# EAGLE board Minimal_carrier_board_for_CM4_rev_B (EAGLE 9.6.2)
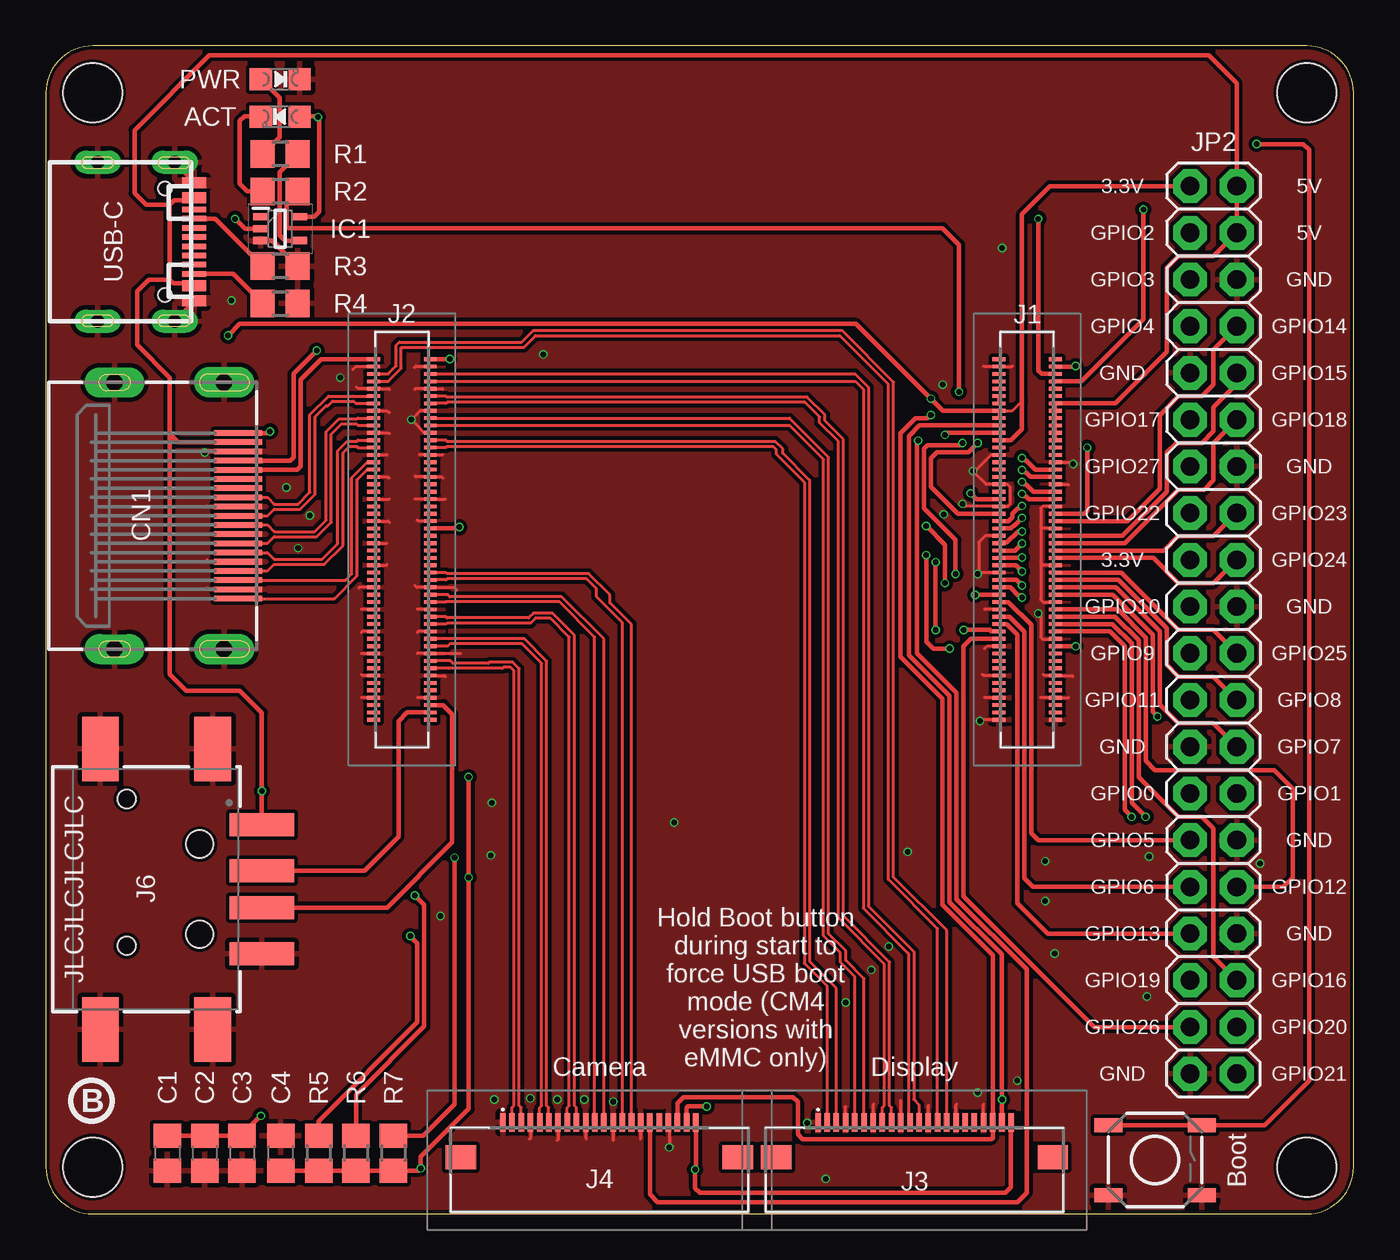
[diagram p0: board, top side]
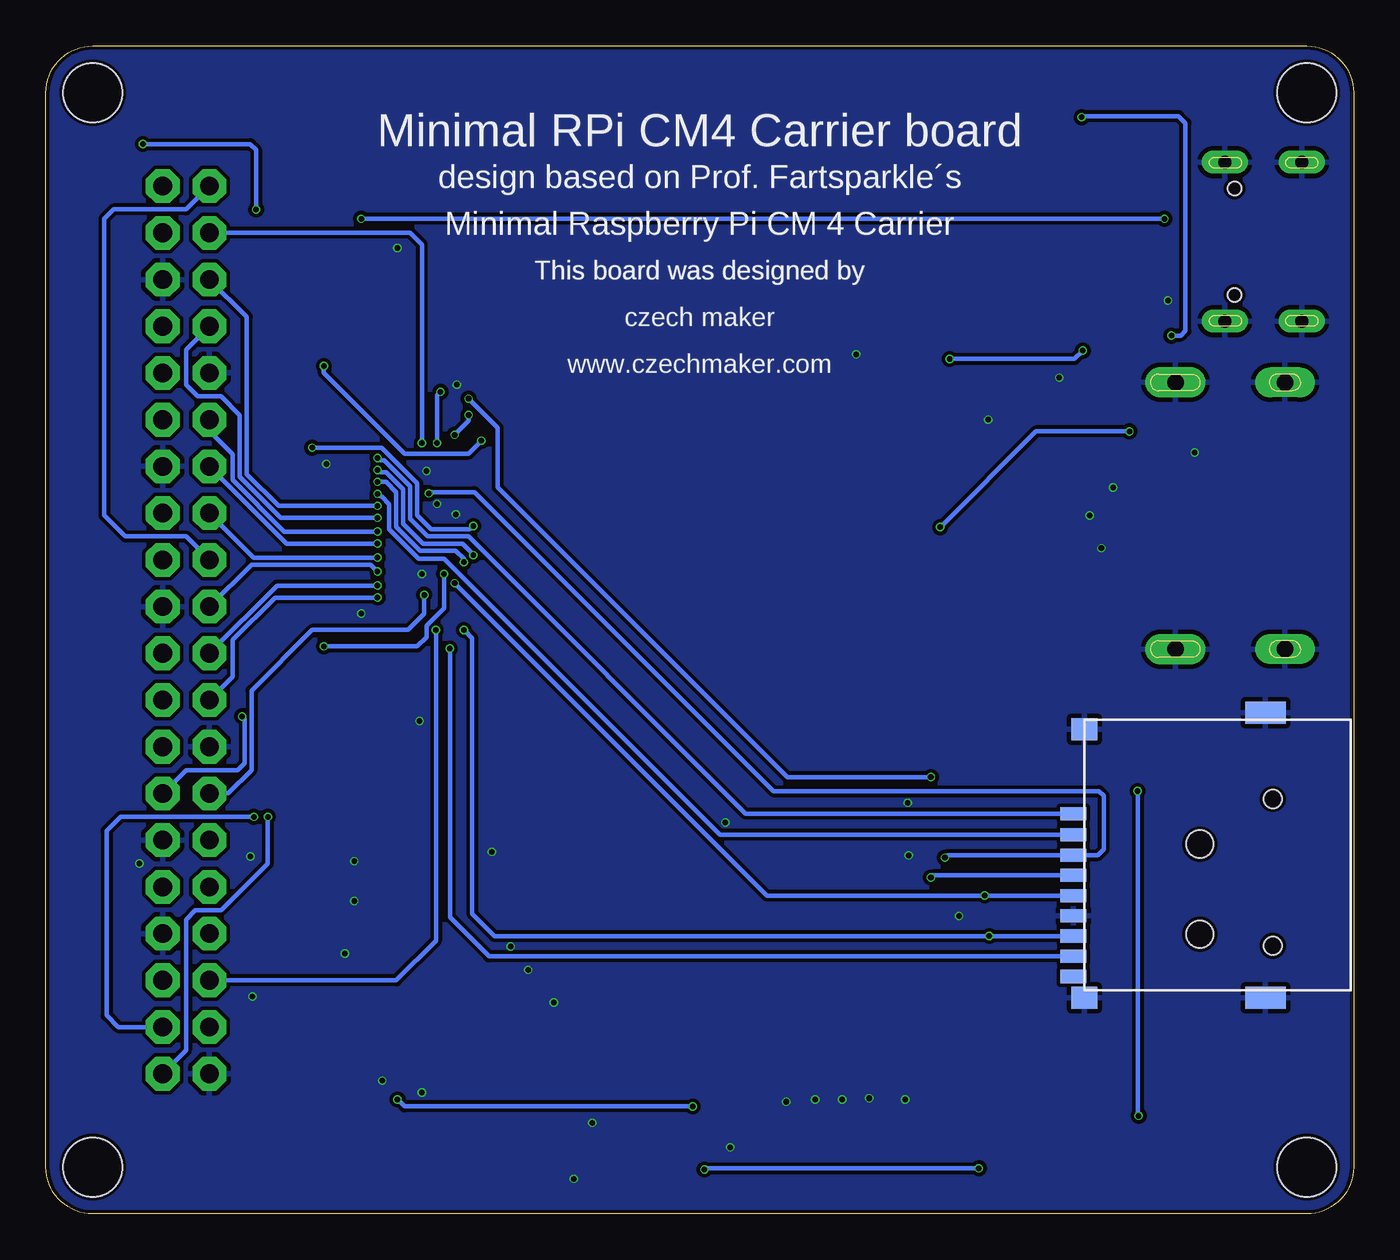
[diagram p1: board, bottom side, seen from below]

Size 71.12 x 63.5 mm. Coordinates in mm from the lower left corner, seen from the top.
Outline: 2.54,0 68.58,0 arc90 71.12,2.54 71.12,60.96 arc90 68.58,63.5 2.54,63.5 arc90 0,60.96 0,2.54 arc90 2.54,0
Copper layers (1*16): Top 0.035mm / dielectric 1.6mm / Bottom 0.035mm
Design rules "jlcpcb2layer": minimum track width 5mil, minimum drill 0.3mm, track to track 5mil, track to pad 5mil, pad to pad 5mil, via to via 5mil, smd to smd 5mil, copper to edge 0.2mm, drill to drill 6mil, minimum pad ring 10mil, minimum via ring 3mil, stop-mask expansion 4mil, vias tented up to drill 0mil, thermal gap 10mil
Net classes: 1 diff_pairs: width 0.152 mm
Holes 3.2 mm at 68.58,2.54 2.54,2.54 68.58,60.96 2.54,60.96

## Footprints (pad centres in the part's own frame; a part is rotated, then mirrored left to right if it is on the bottom)
CHIPLED_0805_NOOUTLINE = smd 1.2 x 1.2: A 0,-1.05; C 0,1.05
TACTILE_SWITCH_5X5_MICRO = smd 1.524 x 0.762: 1 -2.54,1.905; 2 2.54,1.905; 3 -2.54,-1.905; 4 2.54,-1.905
C0805 = smd 1.3 x 1.5: 1 -0.95,0; 2 0.95,0
HDMI_MOLEX_47151-0001 = smd 0.3 x 2.6: 1 4.5,0; 2 4,0; 3 3.5,0; 4 3,0; 5 2.5,0; 6 2,0; 7 1.5,0; 8 1,0; 9 0.5,0; 10 0,0; 11 -0.5,0; 12 -1,0; 13 -1.5,0; 14 -2,0; 15 -2.5,0; 16 -3,0; 17 -3.5,0; 18 -4,0; 19 -4.5,0 | drill 0.9 pad 1.65 long: P$1 -7.25,-0.76; P$2 7.25,-0.76 | drill 0.9 pad 1.5 long: P$3 7.25,-6.72; P$4 -7.25,-6.72
SOT65P210X110-5N = smd 0.85 x 0.4: 1 -1.05,0.65; 2 -1.05,0; 3 -1.05,-0.65; 4 1.05,-0.65; 5 1.05,0.65
DF40C100DS04V51 = smd 0.2 x 0.7: 1 -9.8,-1.54; 2 -9.8,1.54; 3 -9.4,-1.54; 4 -9.4,1.54; 5 -9,-1.54; 6 -9,1.54; 7 -8.6,-1.54; 8 -8.6,1.54; 9 -8.2,-1.54; 10 -8.2,1.54; 11 -7.8,-1.54; 12 -7.8,1.54; 13 -7.4,-1.54; 14 -7.4,1.54; 15 -7,-1.54; 16 -7,1.54; 17 -6.6,-1.54; 18 -6.6,1.54; 19 -6.2,-1.54; 20 -6.2,1.54; 21 -5.8,-1.54; 22 -5.8,1.54; 23 -5.4,-1.54; 24 -5.4,1.54; 25 -5,-1.54; 26 -5,1.54; 27 -4.6,-1.54; 28 -4.6,1.54; 29 -4.2,-1.54; 30 -4.2,1.54; 31 -3.8,-1.54; 32 -3.8,1.54; 33 -3.4,-1.54; 34 -3.4,1.54; 35 -3,-1.54; 36 -3,1.54; 37 -2.6,-1.54; 38 -2.6,1.54; 39 -2.2,-1.54; 40 -2.2,1.54; 41 -1.8,-1.54; 42 -1.8,1.54; 43 -1.4,-1.54; 44 -1.4,1.54; 45 -1,-1.54; 46 -1,1.54; 47 -0.6,-1.54; 48 -0.6,1.54; 49 -0.2,-1.54; 50 -0.2,1.54; 51 0.2,-1.54; 52 0.2,1.54; 53 0.6,-1.54; 54 0.6,1.54; 55 1,-1.54; 56 1,1.54; 57 1.4,-1.54; 58 1.4,1.54; 59 1.8,-1.54; 60 1.8,1.54; 61 2.2,-1.54; 62 2.2,1.54; 63 2.6,-1.54; 64 2.6,1.54; 65 3,-1.54; 66 3,1.54; 67 3.4,-1.54; 68 3.4,1.54; 69 3.8,-1.54; 70 3.8,1.54; 71 4.2,-1.54; 72 4.2,1.54; 73 4.6,-1.54; 74 4.6,1.54; 75 5,-1.54; 76 5,1.54; 77 5.4,-1.54; 78 5.4,1.54; 79 5.8,-1.54; 80 5.8,1.54; 81 6.2,-1.54; 82 6.2,1.54; 83 6.6,-1.54; 84 6.6,1.54; 85 7,-1.54; 86 7,1.54; 87 7.4,-1.54; 88 7.4,1.54; 89 7.8,-1.54; 90 7.8,1.54; 91 8.2,-1.54; 92 8.2,1.54; 93 8.6,-1.54; 94 8.6,1.54; 95 9,-1.54; 96 9,1.54; 97 9.4,-1.54; 98 9.4,1.54; 99 9.8,-1.54; 100 9.8,1.54
545482271 = smd 0.3 x 1: 1 -5.25,2.05; 2 -4.75,2.05; 3 -4.25,2.05; 4 -3.75,2.05; 5 -3.25,2.05; 6 -2.75,2.05; 7 -2.25,2.05; 8 -1.75,2.05; 9 -1.25,2.05; 10 -0.75,2.05; 11 -0.25,2.05; 12 0.25,2.05; 13 0.75,2.05; 14 1.25,2.05; 15 1.75,2.05; 16 2.25,2.05; 17 2.75,2.05; 18 3.25,2.05; 19 3.75,2.05; 20 4.25,2.05; 21 4.75,2.05; 22 5.25,2.05 | smd 1.65 x 1.3: 23 -7.525,0.15; 24 7.525,0.15
629104190121 = smd 1.25 x 3.5: 1 -3.5,6.28; 2 -1,6.28; 3 1,6.28; 4 3.5,6.28 | smd 3.5 x 2: S1 -7.625,3.6; S2 7.625,3.6; S3 -7.625,-2.5; S4 7.625,-2.5 | hole 1.5: -2.45,2.9; 2.45,2.9
2X20 = drill 1.016 octagon: 1 -24.13,-1.27; 2 -24.13,1.27; 3 -21.59,-1.27; 4 -21.59,1.27; 5 -19.05,-1.27; 6 -19.05,1.27; 7 -16.51,-1.27; 8 -16.51,1.27; 9 -13.97,-1.27; 10 -13.97,1.27; 11 -11.43,-1.27; 12 -11.43,1.27; 13 -8.89,-1.27; 14 -8.89,1.27; 15 -6.35,-1.27; 16 -6.35,1.27; 17 -3.81,-1.27; 18 -3.81,1.27; 19 -1.27,-1.27; 20 -1.27,1.27; 21 1.27,-1.27; 22 1.27,1.27; 23 3.81,-1.27; 24 3.81,1.27; 25 6.35,-1.27; 26 6.35,1.27; 27 8.89,-1.27; 28 8.89,1.27; 29 11.43,-1.27; 30 11.43,1.27; 31 13.97,-1.27; 32 13.97,1.27; 33 16.51,-1.27; 34 16.51,1.27; 35 19.05,-1.27; 36 19.05,1.27; 37 21.59,-1.27; 38 21.59,1.27; 39 24.13,-1.27; 40 24.13,1.27
R0805 = smd 1.3 x 1.5: 1 -0.95,0; 2 0.95,0
TFP09-2--12B = smd 0.711 x 1.422: CD -6.6,7.85; CD/DAT3 1.1,7.85; CLK -2.2,7.85; CMD 0,7.85; DAT0 -4.4,7.85; DAT1 -5.5,7.85; DAT2 2.25,7.85; VCC -1.1,7.85; VSS -3.3,7.85 | smd 1.2 x 2.2: GND -7.75,-2.6; GND@1 7.75,-2.6 | smd 1.2 x 1.4: GND@2 -7.75,7.25; GND@3 6.85,7.25 | hole 1: -4.93,-3; 3.05,-3
USB-TYPE-C_16PIN-MALE-TYPE-C-31-M-12 = drill 0.7 pad 1.2 long: 0 -4.32,1.556; 0-1 4.32,1.556; 0-2 4.32,-2.624; 0-3 -4.32,-2.624 | smd 0.3 x 1.3: A1 -3.35,2.623; A4 -2.55,2.623; A5 -1.25,2.623; A6 -0.25,2.623; A7 0.25,2.623; A8 1.25,2.624; A9 2.55,2.623; A12 3.35,2.623; B1 3.05,2.623; B4 2.25,2.623; B5 1.75,2.623; B6 0.75,2.623; B7 -0.75,2.623; B8 -1.75,2.624; B9 -2.25,2.623; B12 -3.05,2.623 | hole 0.75: 2.89,1.026; -2.89,1.026

## Placement (x,y rotation side)
ACT  GREEN  [CHIPLED_0805_NOOUTLINE]  12.74,59.66 90 top
BOOT  TACTILE_SWITCHE_5X5_MICRO_  [TACTILE_SWITCH_5X5_MICRO]  60.33,2.92 0 top
C1  10uF  [C0805]  6.6,3.3 270 top
C2  10uF  [C0805]  8.64,3.3 270 top
C3  10uF  [C0805]  10.67,3.3 270 top
C4  10uF  [C0805]  12.78,3.3 90 top
CN1  [HDMI_MOLEX_47151-0001]  10.45,37.96 270 top
IC1  MC74VHC1G14DFT1G  [SOT65P210X110-5N]  12.74,53.56 0 top
J1  P1-100  [DF40C100DS04V51]  53.36,36.67 90 top
J2  P101-200  [DF40C100DS04V51]  19.36,36.67 90 top
J3  54548-2271  [545482271]  47.24,2.92 0 top
J4  54548-2271  [545482271]  30.1,2.92 0 top
J6  629104190121  [629104190121]  5.46,17.65 270 top
JP2  [2X20]  63.5,31.75 270 top
PWR  RED/ORANGE  [CHIPLED_0805_NOOUTLINE]  12.74,61.69 270 top
R1  1k  [R0805]  12.74,57.63 180 top
R2  1k  [R0805]  12.74,55.6 180 top
R3  5.1k  [R0805]  12.74,51.53 180 top
R4  5.1k  [R0805]  12.74,49.5 0 top
R5  10K  [R0805]  14.83,3.3 270 top
R6  10K  [R0805]  16.87,3.3 270 top
R7  10K  [R0805]  18.9,3.3 270 top
SD_CARD  MICRO_SD_CARD_  [TFP09-2--12B]  7.39,19.51 90 bottom
USB-C  TYPE-C-31-M-12  [USB-TYPE-C_16PIN-MALE-TYPE-C-31-M-12]  5.44,52.86 270 top

## Library data of the parts
ACT PWR = microbuilder
BOOT = dronecz
C1-C4 = rcl; SPICEPREFIX: C
CN1 = microbuilder; LINK: https://cz.mouser.com/ProductDetail/Molex/47151-1081?qs=rg3U%2F5nEhHf8zd%2FI8aNW2A%3D%3D
IC1 = SamacSys_Parts; HEIGHT: 1.1mm; MANUFACTURER_NAME: ON Semiconductor; MANUFACTURER_PART_NUMBER: MC74VHC1G14DFT1G; MOUSER_PART_NUMBER: 863-MC74VHC1G14DFT1G; MOUSER_PRICE-STOCK: https://www.mouser.co.uk/ProductDetail/ON-Semiconductor/MC74VHC1G14DFT1G?qs=YOLdObVcOZkl2BbCxsVnXA%3D%3D
J1 J2 = SamacSys_Parts; DESCRIPTION: HIROSE(HRS) - DF40C-100DS-0.4V(51) - CONNECTOR, STACKING, RCPT, 100POS, 2ROW; HEIGHT: 1.65mm; MANUFACTURER_NAME: Hirose; MANUFACTURER_PART_NUMBER: DF40C-100DS-0.4V(51); MOUSER_PART_NUMBER: 798-DF40C100DS0.4V51; MOUSER_PRICE-STOCK: https://www.mouser.co.uk/ProductDetail/Hirose-Connector/DF40C-100DS-04V51?qs=eDUdFcBPps2MEwbnuPvZzQ%3D%3D
J3 J4 = dronecz; DESCRIPTION: FFC & FPC Connectors 0.5 FPC ZIF Hsg Assy ssy 22Ckt EmbsTp Pkg; HEIGHT: 1mm; MANUFACTURER_NAME: Molex; MANUFACTURER_PART_NUMBER: 54548-2271; MOUSER_PART_NUMBER: 538-54548-2271; MOUSER_PRICE-STOCK: https://www.mouser.co.uk/ProductDetail/Molex/54548-2271?qs=qM7ngqbhX5X3ZiWzRWv9wA%3D%3D
J6 = Wurth_Connectors_WR-USB; APPLICATION: USB 2.0; DATASHEET-URL: https://www.we-online.com/catalog/datasheet/629104190121.pdf; GERDER: Receptacle; INTERFACE-TYPE: Type A; IR1: 1.5A; MOUNT: SMT; PACKAGING: Tape and Reel & Mylar; PART-NUMBER: 629104190121; PINS: 4; TYPE: Horizontal - Short Type; WORKING-VOLTAGE: 30V(AC)
JP2 = pinhead
R1-R7 = rcl; SPICEPREFIX: R
SD_CARD = dronecz; TEST: test
USB-C = Custom-Parts

## Nets
1.8V: J1.88 J1.90
3.3V: ACT.A C4.1 IC1.5 J1.78 J1.84 J1.86 J3.22 J4.22 JP2.1 JP2.17 R5.2 R6.2 R7.2 SD_CARD.VCC
5.0V: C1.1 C2.1 C3.1 CN1.18 J1.77 J1.79 J1.81 J1.83 J1.85 J1.87 J6.1 JP2.2 JP2.4 USB-C.A4 USB-C.A9 USB-C.B4 USB-C.B9
AIN0: J1.96
AIN1: J1.94
BT_NDISABLE: J1.91
CAM0_C_N: J2.40
CAM0_C_P: J2.42
CAM0_D0_N: J2.28
CAM0_D0_P: J2.30
CAM0_D1_N: J2.34
CAM0_D1_P: J2.36
CAM1_C_N [diff_pairs]: J2.27 J4.8
CAM1_C_P [diff_pairs]: J2.29 J4.9
CAM1_D0_N [diff_pairs]: J2.15 J4.2
CAM1_D0_P [diff_pairs]: J2.17 J4.3
CAM1_D1_N [diff_pairs]: J2.21 J4.5
CAM1_D1_P [diff_pairs]: J2.23 J4.6
CAM1_D2_N [diff_pairs]: J2.33 J4.11
CAM1_D2_P [diff_pairs]: J2.35 J4.12
CAM1_D3_N [diff_pairs]: J2.39 J4.14
CAM1_D3_P [diff_pairs]: J2.41 J4.15
CAM_GPIO: J1.97 J4.17
DSI0_C_N: J2.69
DSI0_C_P: J2.71
DSI0_D0_N: J2.57
DSI0_D0_P: J2.59
DSI0_D1_N: J2.63
DSI0_D1_P: J2.65
DSI1_C_N [diff_pairs]: J2.87 J3.8
DSI1_C_P [diff_pairs]: J2.89 J3.9
DSI1_D0_N [diff_pairs]: J2.75 J3.2
DSI1_D0_P [diff_pairs]: J2.77 J3.3
DSI1_D1_N [diff_pairs]: J2.81 J3.5
DSI1_D1_P [diff_pairs]: J2.83 J3.6
DSI1_D2_N [diff_pairs]: J2.93 J3.11
DSI1_D2_P [diff_pairs]: J2.95 J3.12
DSI1_D3_N [diff_pairs]: J2.94 J3.14
DSI1_D3_P [diff_pairs]: J2.96 J3.15
EEPROM_NWP: J1.20
ETH_LEDG: J1.15
ETH_LEDY: J1.17
ETH_SYNC_IN: J1.16
ETH_SYNC_OUT: J1.18
GLOBAL_EN: J1.99
GND: BOOT.3 BOOT.4 C1.2 C2.2 C3.2 C4.2 CN1.2 CN1.5 CN1.8 CN1.11 CN1.17 CN1.P$1 CN1.P$2 CN1.P$3 CN1.P$4 IC1.3 J1.1 J1.2 J1.7 J1.8 J1.13 J1.14 J1.22 J1.23 J1.32 J1.33 J1.42 J1.43 J1.52 J1.53 J1.59 J1.60 J1.65 J1.66 J1.71 J1.74 J1.98 J2.7 J2.8 J2.13 J2.14 J2.19 J2.20 J2.25 J2.26 J2.31 J2.32 J2.37 J2.38 J2.44 J2.50 J2.55 J2.56 J2.61 J2.62 J2.67 J2.68 J2.73 J2.74 J2.79 J2.80 J2.85 J2.86 J2.91 J2.92 J2.97 J2.98 J3.1 J3.4 J3.7 J3.10 J3.13 J3.16 J3.19 J4.1 J4.4 J4.7 J4.10 J4.13 J4.16 J4.19 J6.4 J6.S1 J6.S2 J6.S3 J6.S4 JP2.6 JP2.9 JP2.14 JP2.20 JP2.25 JP2.30 JP2.34 JP2.39 PWR.C R3.1 R4.2 SD_CARD.GND SD_CARD.GND@1 SD_CARD.GND@2 SD_CARD.GND@3 SD_CARD.VSS USB-C.0 USB-C.0-1 USB-C.0-2 USB-C.0-3 USB-C.A1 USB-C.A12 USB-C.B1 USB-C.B12
GPIO2: J1.58 JP2.3
GPIO3: J1.56 JP2.5
GPIO4: J1.54 JP2.7
GPIO5: J1.34 JP2.29
GPIO6: J1.30 JP2.31
GPIO7: J1.37 JP2.26
GPIO8: J1.39 JP2.24
GPIO9: J1.40 JP2.21
GPIO10: J1.44 JP2.19
GPIO11: J1.38 JP2.23
GPIO12: J1.31 JP2.32
GPIO13: J1.28 JP2.33
GPIO14: J1.55 JP2.8
GPIO15: J1.51 JP2.10
GPIO16: J1.29 JP2.36
GPIO17: J1.50 JP2.11
GPIO18: J1.49 JP2.12
GPIO19: J1.26 JP2.35
GPIO20: J1.27 JP2.38
GPIO21: J1.25 JP2.40
GPIO22: J1.46 JP2.15
GPIO23: J1.47 JP2.16
GPIO24: J1.45 JP2.18
GPIO25: J1.41 JP2.22
GPIO26: J1.24 JP2.37
GPIO27: J1.48 JP2.13
HDMI0_CEC: J2.51
HDMI0_CK_N [diff_pairs]: CN1.12 J2.90
HDMI0_CK_P [diff_pairs]: CN1.10 J2.88
HDMI0_D0_N [diff_pairs]: CN1.9 J2.84
HDMI0_D0_P [diff_pairs]: CN1.7 J2.82
HDMI0_D1_N [diff_pairs]: CN1.6 J2.78
HDMI0_D1_P [diff_pairs]: CN1.4 J2.76
HDMI0_D2_N [diff_pairs]: CN1.3 J2.72
HDMI0_D2_P [diff_pairs]: CN1.1 J2.70
HDMI0_HOTPLUG: CN1.19 J2.53
HDMI0_SCL: CN1.15 J2.100
HDMI0_SDA: CN1.16 J2.99
HDMI1_CEC: J2.49
HDMI1_CK_N: J2.66
HDMI1_CK_P: J2.64
HDMI1_D0_N: J2.60
HDMI1_D0_P: J2.58
HDMI1_D1_N: J2.54
HDMI1_D1_P: J2.52
HDMI1_D2_N: J2.48
HDMI1_D2_P: J2.46
HDMI1_HOPLUG: J2.43
HDMI1_SCL: J2.47
HDMI1_SDA: J2.45
ID_SC: J1.35 JP2.28
ID_SD: J1.36 JP2.27
N$1: ACT.C R2.2
N$3: R4.1 USB-C.B5
N$4: IC1.4 R1.1
N$6: PWR.A R1.2
N$8: R3.2 USB-C.A5
N$9: SD_CARD.CD
N$24: J3.17
N$25: J3.18
N_EXTRST: J1.100
N_PWR_LED: IC1.2 J1.95
N_RPIBOOT: BOOT.1 BOOT.2 J1.93
PCIE__RX_N: J2.18
PCIE_CLK_N: J2.12
PCIE_CLK_NREQ: J2.2
PCIE_CLK_P: J2.10
PCIE_NRST: J2.9
PCIE_RX_P: J2.16
PCIE_TX_N: J2.24
PCIE_TX_P: J2.22
PI_NLED_ACTVITY: J1.21 R2.1
RUN_PG: J1.92
SCL0: J1.80 J3.20 J4.20
SD_CLK: J1.57 R6.1 SD_CARD.CLK
SD_CMD: J1.62 R7.1 SD_CARD.CMD
SD_DAT0: J1.63 R5.1 SD_CARD.DAT0
SD_DAT1: J1.67 SD_CARD.DAT1
SD_DAT2: J1.69 SD_CARD.DAT2
SD_DAT3: J1.61 SD_CARD.CD/DAT3
SD_DET: J1.76
SD_PWR_ON: J1.75
SDA0: J1.82 J3.21 J4.21
TRD0_N: J1.10
TRD0_P: J1.12
TRD1_N: J1.6
TRD1_P: J1.4
TRD2_N: J1.9
TRD2_P: J1.11
TRD3_N: J1.5
TRD3_P: J1.3
TV_OUT: J2.11
USB2_N: J2.3 J6.2
USB2_P [diff_pairs]: J2.5 J6.3
USBOTG_ID: J2.1
WL_NDISABLE: J1.89

## Tracks (layer width: path | path; a pad name or v marks a point on that pad's centre or on a via)
1.8V
  Top 0.152: J1.88 J1.90
3.3V  (via drill 0.3)
  Top 0.152: J1.84 J1.86 52.56,43.67 53.09,44.2
  Top 0.254: IC1.5 14.59,54.21 14.86,54.48 14.86,59.56 v14.8,59.63 14.73,59.69 13.82,59.69 ACT.A | v9.91,47.75 10.54,48.39 44.07,48.39 v48.13,44.32 48.79,43.67 J1.86 | J1.78 52.48,42.07 53.09,42.67 53.09,44.2 53.09,54.36 54.61,55.88 JP2.1 | C4.1 R5.2 R6.2 R7.2 20.26,2.35 v20.38,2.48 20.38,3.11 22.99,5.71 v22.99,18.29 v22.99,23.75 | J4.22 35.35,2.46 v35.31,2.41 35.31,1.4 35.56,1.14 52.2,1.14 52.49,1.44 J3.22
  Bottom 0.254: v9.91,47.75 9.4,47.75 9.14,48.01 9.14,59.31 9.53,59.69 14.73,59.69 v14.8,59.63 | JP2.1 63.5,54.61 67.44,54.61 67.94,54.1 67.94,37.97 66.8,36.83 63.5,36.83 JP2.17 | SD_CARD.VCC 22.87,18.41 v22.99,18.29 | v35.31,2.41 35.24,2.48 v20.38,2.48 | v22.99,23.75 30.8,23.75 46.55,39.5 46.55,42.74 v48.13,44.32
5.0V  (via drill 0.3)
  Top 0.15: J1.87 J1.85 J1.83 J1.81 J1.79 J1.77
  Top 0.152: USB-C.A4 USB-C.B9 | USB-C.A9 USB-C.B4
  Top 0.254: USB-C.B4 6.92,50.61 6.73,50.8 | 6.73,50.8 6.73,54.86 | 6.73,54.86 6.98,55.11 USB-C.B9 | CN1.18 7.19,41.96 6.73,42.42 | 6.73,50.8 5.59,50.8 4.95,50.16 4.95,47.24 6.73,45.47 6.73,42.42 | J6.1 v11.74,22.99 11.74,27.25 10.54,28.45 7.62,28.45 6.73,29.34 6.73,42.42 | 6.73,54.86 5.46,54.86 4.83,55.5 4.83,58.93 8.89,62.99 63.25,62.99 64.77,61.47 JP2.2 JP2.4 63.5,52.07 61.59,52.07 60.96,51.44 60.96,46.86 58.16,44.07 J1.87 | C3.1 C2.1 C1.1 10.6,4.25 v11.68,5.33
  Bottom 0.254: v11.74,22.99 11.74,5.39 v11.68,5.33
CAM1_C_N
  Top 0.152: J4.8 28.35,5.78 28.46,5.89 28.46,31.36 27.43,32.38 26.63,32.38 26.37,32.13 21.82,32.13 21.76,32.07 J2.27
CAM1_C_P
  Top 0.152: J4.9 28.85,5.78 28.74,5.89 28.74,31.47 27.55,32.66 26.51,32.66 26.25,32.41 21.81,32.41 21.75,32.47 J2.29
CAM1_D0_N
  Top 0.152: J4.2 25.35,5.78 25.46,5.89 25.46,29.53 25.27,29.72 24.89,29.72 24.83,29.66 21.91,29.66 21.9,29.67 J2.15
CAM1_D0_P
  Top 0.152: J4.3 25.85,5.78 25.74,5.89 25.74,29.65 25.39,30 24.12,30 24.06,29.94 22.13,29.94 22,30.07 J2.17
CAM1_D1_N
  Top 0.152: J4.5 26.85,5.78 26.96,5.89 26.96,29.94 25.91,30.99 21.97,30.99 21.85,30.87 J2.21
CAM1_D1_P
  Top 0.152: J4.6 27.35,5.78 27.24,5.89 27.24,30.05 26.02,31.27 J2.23
CAM1_D2_N
  Top 0.152: J4.11 29.85,31.36 27.94,33.27 21.74,33.27 21.73,33.27 J2.33
CAM1_D2_P
  Top 0.152: J4.12 30.35,31.26 28.06,33.55 21.96,33.55 21.85,33.67 J2.35
CAM1_D3_N
  Top 0.152: J4.14 31.35,32.15 29.94,33.56 29.94,33.99 29.41,34.53 21.82,34.53 21.76,34.47 J2.39
CAM1_D3_P
  Top 0.152: J4.15 31.85,32.05 30.68,33.22 30.68,33.65 29.52,34.81 21.81,34.81 21.75,34.87 J2.41
CAM_GPIO  (via drill 0.3)
  Top 0.254: J1.97 55.97,46.07 v56.01,46.1 | v47.43,42.04 47.37,41.97 47.37,30.48 49.53,28.32 49.53,17.11 53.34,13.3 53.34,1.14 52.83,0.64 33.27,0.64 32.85,1.06 J4.17
  Bottom 0.254: v47.43,42.04 48.13,41.34 51.63,41.34 56.01,45.72 v56.01,46.1
DSI1_C_N
  Top 0.152: J3.8 45.49,5.78 45.6,5.89 45.6,13.58 43.09,16.09 43.09,42 42.08,43.01 42.08,43.33 | J2.87 21.76,44.07 21.82,44.13 41.29,44.13 42.08,43.33 | 42.08,43.33 | 42.08,43.33
DSI1_C_P
  Top 0.152: J3.9 45.99,5.78 45.88,5.89 45.88,13.69 43.37,16.21 43.37,42.12 42.36,43.12 | J2.89 21.75,44.47 21.81,44.41 41.4,44.41 42.36,43.45 42.36,43.12 | 42.36,43.12
DSI1_D0_N
  Top 0.152: J3.2 42.49,12.37 41.25,13.61 41.25,39.78 39.72,41.31 39.72,41.55 39.54,41.73 21.82,41.73 21.76,41.67 J2.75
DSI1_D0_P
  Top 0.152: J3.3 42.99,12.27 41.53,13.73 41.53,39.89 40.08,41.35 40.08,41.59 39.66,42.01 21.81,42.01 21.75,42.07 J2.77
DSI1_D1_N
  Top 0.152: J2.81 40.45,42.87 42.29,41.02 42.29,15.11 43.21,14.19 43.21,13.69 43.99,12.9 J3.5
DSI1_D1_P
  Top 0.152: J2.83 40.44,43.27 42.57,41.14 42.57,15.23 43.51,14.29 43.51,13.79 44.49,12.8 J3.6
DSI1_D2_N
  Top 0.152: J2.93 44.02,45.27 44.45,44.83 44.45,16.62 46.92,14.15 46.92,13.45 46.92,5.04 J3.11
DSI1_D2_P
  Top 0.152: J2.95 44.01,45.67 44.73,44.95 44.73,16.74 47.2,14.27 47.2,6.22 47.49,5.93 J3.12
DSI1_D3_N
  Top 0.152: J3.14 48.49,15.51 45.82,18.19 45.82,45.11 43.18,47.75 26.63,47.75 25.99,47.12 19.33,47.12 19.33,45.98 18.61,45.27 J2.94
DSI1_D3_P
  Top 0.152: J3.15 48.99,15.41 46.1,18.3 46.1,45.23 43.3,48.03 26.51,48.03 25.88,47.4 19.21,47.4 19.05,47.23 19.05,46.1 18.61,45.67 J2.96
GND  (via drill 0.3)
  Top 0.152: USB-C.A1 USB-C.B12 | USB-C.A12 USB-C.B1 | CN1.2 8.84,33.96 8.76,34.04 | CN1.5 8.87,35.46 8.76,35.56 | CN1.8 8.76,36.96 | 8.76,36.96 | CN1.11 8.79,38.46 8.76,38.48 | J1.65 55.58,39.67 55.63,39.62 | J1.71 55.78,40.87 v55.88,40.77 | J1.59 54.21,38.47 54.1,38.35 54.1,37.34 | J1.33 54.24,33.27 54.1,33.4 54.1,35.43 | 54.1,37.34 54.1,35.43 | J1.43 54.27,35.27 54.1,35.43 | J1.53 54.17,37.27 54.1,37.34 | 54.23,29.34 54.3,29.27 J1.13 55.82,29.27 55.88,29.21 | 55.63,28.07 55.62,28.07 J1.7 54.1,28.07 | v53.98,32.64 54.1,32.51 54.1,31.37 54.23,31.24 54.88,31.24 J1.23 | J1.2 50.87,26.87 v50.8,26.8 | J1.8 51.05,28.07 | J1.14 51,29.27 50.93,29.34 | J1.22 51.19,30.87 51.05,30.73 | 52.58,46.1 52.54,46.07 J1.98 51.03,46.07 50.99,46.1 | 50.48,40.32 51.14,39.67 J1.66 52.28,39.67 52.45,39.5 52.45,38.61 52.32,38.48 51.84,38.48 J1.60 49.99,38.47 v49.85,38.61 | 50.48,40.32 v50.42,40.39 | J1.74 51.43,41.27 50.48,40.32 | J1.32 51.08,32.87 51.05,32.89 | 21.59,44.83 21.55,44.87 J2.91 20.1,44.87 20.07,44.83 | 21.59,41.27 20.91,41.27 J2.73 20.33,41.27 20.32,41.27 | 21.59,40.01 21.53,40.07 J2.67 20.13,40.07 20.07,40.13 | 21.72,38.86 21.71,38.87 J2.61 20.07,38.86 | J2.55 20.25,37.67 20.19,37.72 | 22.35,33.91 22.2,34.07 J2.37 20.16,34.07 20.07,34.16 | J2.13 21.66,29.27 21.72,29.21 | J2.7 20.19,28.07 | J2.8 17.15,28.07 17.14,28.07 | J2.14 17.22,29.27 17.14,29.34 | J2.20 17.16,30.47 17.14,30.48 | J2.26 17.19,31.67 17.14,31.62 | J2.32 17.17,32.87 17.14,32.89 | J2.38 17.05,34.07 17.02,34.04 | J2.44 18.5,35.27 18.54,35.31 | J2.50 18.52,36.47 18.54,36.45 | J2.56 18.59,37.67 18.67,37.59 | J2.62 18.66,38.87 18.67,38.86 | J2.68 18.61,40.07 18.67,40.01
  Top 0.152: J2.74 18.53,41.27 18.54,41.27 | J2.80 18.62,42.47 18.67,42.42 | J2.86 18.56,43.67 18.67,43.56 | 18.67,44.83 18.63,44.87 J2.92 16.98,44.87 16.89,44.96 | 50.74,34.86 50.74,34.87 J1.42 | 50.74,34.86 v50.67,34.8 | J1.52 51.09,36.87 50.74,36.51 50.74,34.86 | 20.19,30.48 J2.19 20.92,30.48 22.54,30.48 | J2.25 20.24,31.67 20.19,31.62 | J2.31 20.22,32.87 20.19,32.89 | J4.19 33.91,4.91 v33.91,3.62 | J4.16 32.35,4.09 32.32,4.06 | J4.4 26.35,4.12 26.29,4.06 | J4.7 27.85,4.04 27.81,4 | J4.10 29.35,4.12 29.4,4.06 | J4.13 30.85,4.01 30.86,4 | J3.16 49.49,5.93 49.53,5.97 | J3.19 50.99,5.96 50.99,5.97 | J3.13 47.99,5.89 48.01,5.91 | J3.10 46.49,6.15 46.48,6.16 | J3.7 44.99,5.94 45.02,5.97 | J3.4 43.49,5.84 43.5,5.84 | J2.97 20.16,46.07 20.13,46.1 20.03,46.01 | J2.98 16.86,46.07 16.7,45.91 | J2.85 20.36,43.67 v19.88,43.18 20.35,42.7 20.35,42.68 20.57,42.47 J2.79
  Top 0.254: USB-C.0-1 7.97,49.51 USB-C.A12 | USB-C.A1 7.97,56.21 USB-C.0 | IC1.3 12.31,52.91 R3.1 | CN1.17 8.69,41.46 v8.64,41.4
  other vias: 13.08,39.5 14.35,37.97 13.72,36.2 48.83,38.04 54.36,19.18 54.36,17.02 27.05,46.74 42.42,1.91 66.04,19.05 41.4,4.95 52.83,7.24 50.67,6.6 44.89,13.27 43.5,11.49 45.85,14.54 54.86,14.16 59.88,11.81 21.46,16.19 34.16,21.27 24.26,22.35 24.19,19.49 60.01,19.43 27.81,6.22 26.35,6.29 24.38,6.22 29.27,6.22 30.86,6.1 16,45.47 10.1,49.66 48.77,45.09 52.01,52.51 46.86,19.68
  pour Top (isolate 0.203): -0.4,64.43 72.42,64.43 72.42,-1.82 -0.4,-1.82
  pour Bottom (isolate 0.203): -2.68,65.2 73.57,65.2 73.57,-2.71 -2.68,-2.71
GPIO2  (via drill 0.3)
  Top 0.254: J1.58 50.8,38.07 49.59,38.07 48.13,39.53 48.13,41.08 48.45,41.4 50.16,41.4 v50.67,41.91
  Bottom 0.254: v50.67,41.91 50.67,52.7 51.31,53.34 JP2.3
GPIO3  (via drill 0.3)
  Top 0.254: J1.56 52.36,37.67 52.57,37.88 52.57,38.06 52.87,38.36 52.95,38.36 v53.09,38.5
  Bottom 0.254: v53.09,38.5 58.47,38.5 60.2,40.22 60.2,48.77 JP2.5
GPIO4  (via drill 0.3)
  Top 0.254: J1.54 52.49,37.27 52.71,37.48 52.72,37.48 v53.09,37.85
  Bottom 0.254: v53.09,37.85 58.36,37.85 60.58,40.07 60.58,43.43 61.59,44.45 62.87,44.45 63.5,45.09 63.5,46.99 JP2.7
GPIO5
  Top 0.254: JP2.29 53.98,20.32 53.59,20.7 53.59,32.02 52.35,33.27 J1.34
GPIO6
  Top 0.254: JP2.31 53.69,17.78 53.21,18.26 53.21,31.65 52.4,32.47 J1.30
GPIO7
  Top 0.254: J1.37 58.2,34.07 60.58,31.69 60.58,27.69 61.59,26.67 63.5,26.67 JP2.26
GPIO8
  Top 0.254: J1.39 58.34,34.47 60.96,31.85 60.96,29.84 61.59,29.21 63.5,29.21 JP2.24
GPIO9  (via drill 0.3)
  Top 0.254: J1.40 52.78,34.47 v53.09,34.16
  Bottom 0.254: v53.09,34.16 58.55,34.16 JP2.21
GPIO10  (via drill 0.3)
  Top 0.254: J1.44 52.74,35.27 v53.09,34.92
  Bottom 0.254: JP2.19 59.94,35.31 53.47,35.31 v53.09,34.92
GPIO11  (via drill 0.3)
  Top 0.254: v53.09,33.51 52.95,33.65 52.87,33.65 52.45,34.07 J1.38
  Bottom 0.254: v53.09,33.51 58.66,33.51 60.96,31.21 60.96,29.21 JP2.23
GPIO12
  Top 0.254: JP2.32 67.31,17.78 67.82,18.29 67.82,23.11 66.8,24.13 60.33,24.13 59.82,24.64 59.82,31.34 58.29,32.87 J1.31
GPIO13
  Top 0.254: J1.28 52.26,32.07 52.83,31.5 52.83,16.89 54.48,15.24 JP2.33
GPIO14
  Top 0.254: J1.55 58.81,37.67 60.58,39.43 60.58,43.43 61.59,44.45 62.87,44.45 63.5,45.09 63.5,46.99 JP2.8
GPIO15
  Top 0.254: J1.51 58.55,36.87 60.96,39.27 60.96,41.4 61.47,41.91 62.87,41.91 63.5,42.55 63.5,43.85 64.77,45.12 JP2.10
GPIO16
  Top 0.254: JP2.36 63.5,13.97 63.5,20.95 62.87,21.59 61.59,21.59 59.44,23.75 59.44,31.18 58.15,32.47 J1.29
GPIO17  (via drill 0.3)
  Top 0.254: J1.50 51.87,36.51 52.28,36.51 52.87,37.1 v53.09,37.1
  Bottom 0.254: v53.09,37.1 58.15,37.1 60.96,39.91 60.96,41.31 62.23,42.59 JP2.11
GPIO18
  Top 0.254: J1.49 58.69,36.47 61.59,39.37 62.99,39.37 63.5,39.88 63.5,41.91 JP2.12
GPIO19  (via drill 0.3)
  Top 0.254: v49.91,31.75 51.33,31.75 51.4,31.68 51.8,31.68 J1.26
  Bottom 0.254: v49.91,31.75 49.91,14.86 52.07,12.7 JP2.35
GPIO20  (via drill 0.3)
  Top 0.254: v59.82,21.59 59.05,22.35 59.05,31.02 58.01,32.07 J1.27
  Bottom 0.254: v59.82,21.59 67.06,21.59 67.82,20.83 67.82,10.79 67.18,10.16 JP2.38
GPIO21  (via drill 0.3)
  Top 0.254: J1.25 57.87,31.67 58.67,30.86 58.67,21.97 v59.05,21.59
  Bottom 0.254: v59.05,21.59 59.05,19.05 61.59,16.51 62.99,16.51 63.5,16 63.5,8.89 JP2.40
GPIO22  (via drill 0.3)
  Top 0.254: J1.46 53.06,35.67 v53.09,35.69
  Bottom 0.254: v53.09,35.69 59.82,35.69 JP2.15
GPIO23
  Top 0.254: J1.47 60.79,36.07 61.55,36.83 63.5,36.83 JP2.16
GPIO24
  Top 0.254: J1.45 60.22,35.67 61.59,34.29 63.5,34.29 JP2.18
GPIO25
  Top 0.254: J1.41 58.48,34.87 61.59,31.75 63.5,31.75 JP2.22
GPIO26
  Top 0.254: JP2.37 57.02,10.16 49.91,17.27 49.91,30.86 50.32,31.27 J1.24
GPIO27  (via drill 0.3)
  Top 0.254: J1.48 52.7,36.07 v53.09,36.45
  Bottom 0.254: v53.09,36.45 58.04,36.45 JP2.13
HDMI0_CK_N
  Top 0.152: CN1.12 12.05,38.96 12.41,38.6 13.72,38.6 14.35,39.23 14.35,43.45 15.37,44.46 16.73,44.46 16.73,44.47 J2.90
HDMI0_CK_P
  Top 0.152: CN1.10 12.05,37.96 12.41,38.32 13.83,38.32 14.63,39.12 14.63,43.33 15.24,43.94 15.34,43.94 15.58,44.19 16.73,44.19 16.85,44.07 J2.88
HDMI0_D0_N
  Top 0.152: CN1.9 12.05,37.46 12.41,37.1 14.62,37.1 15.24,37.72 15.24,42.52 15.93,43.21 16.91,43.21 16.97,43.27 J2.84
HDMI0_D0_P
  Top 0.152: CN1.7 12.05,36.46 12.41,36.82 14.73,36.82 15.52,37.6 15.52,42.4 16.04,42.93 16.92,42.93 16.98,42.87 J2.82
HDMI0_D1_N
  Top 0.152: CN1.6 12.05,35.96 12.41,35.6 15.02,35.6 15.88,36.45 15.88,41.49 16.39,42.01 16.91,42.01 16.97,42.07 J2.78
HDMI0_D1_P
  Top 0.152: CN1.4 12.05,34.96 12.41,35.32 15.14,35.32 16.15,36.33 16.15,41.37 16.51,41.73 16.92,41.73 16.98,41.67 J2.76
HDMI0_D2_N
  Top 0.152: CN1.3 16.3,34.46 16.64,34.8 16.64,40.04 17.47,40.87 J2.72
HDMI0_D2_P
  Top 0.152: CN1.1 15.69,33.46 16.92,34.68 16.92,39.92 17.47,40.47 J2.70
HDMI0_HOTPLUG  (via drill 0.3)
  Top 0.254: CN1.19 12.1,42.46 v12.19,42.55 | v22.48,37.34 22.41,37.27 J2.53
  Bottom 0.254: v12.19,42.55 17.27,42.55 v22.48,37.34
HDMI0_SCL
  Top 0.254: CN1.15 13.66,40.46 13.84,40.64 13.84,45.34 14.73,46.23 14.97,46.47 J2.100
HDMI0_SDA  (via drill 0.3)
  Top 0.254: CN1.16 13.27,40.96 13.46,41.15 13.46,45.67 v14.72,46.94 | J2.99 21.95,46.47 v21.97,46.48
  Bottom 0.254: v21.97,46.48 15.18,46.48 v14.72,46.94
ID_SC  (via drill 0.3)
  Top 0.254: J1.35 58.03,33.67 60.2,31.5 60.2,27.3 v60.45,27.05
  Bottom 0.254: v60.45,27.05 60.33,26.92 60.33,24.51 60.71,24.13 63.5,24.13 JP2.28
ID_SD  (via drill 0.3)
  Top 0.254: J1.36 v50.56,33.67 v50.55,33.66
  Bottom 0.254: v50.55,33.66 50.55,32.64 51.44,31.75 56.64,31.75 59.94,28.45 59.94,24.13 61.21,22.86 JP2.27
N$1
  Top 0.254: R2.2 10.95,55.6 10.54,56.01 10.54,59.44 10.79,59.69 11.66,59.69 ACT.C
N$3
  Top 0.254: USB-C.B5 10.18,51.11 R4.1
N$4
  Top 0.254: IC1.4 13,52.91 12.7,53.21 12.7,56.64 R1.1
N$6
  Top 0.254: R1.2 12.7,58.54 12.7,60.68 PWR.A
N$8
  Top 0.254: USB-C.A5 9.21,54.11 R3.2
N_PWR_LED  (via drill 0.3)
  Top 0.254: IC1.2 10.82,53.56 v10.29,54.1 | J1.95 54.16,45.67 53.98,45.85 v53.98,54.1
  Bottom 0.254: v10.29,54.1 v53.98,54.1
N_RPIBOOT  (via drill 0.3)
  Top 0.254: J1.93 56.31,45.27 59.69,48.64 v59.69,54.61 | v65.85,58.17 68.39,58.17 68.71,57.85 68.71,7.24 66.29,4.83 BOOT.2 BOOT.1
  Bottom 0.254: v65.85,58.17 60.01,58.17 59.69,57.85 v59.69,54.61
PI_NLED_ACTVITY  (via drill 0.3)
  Top 0.254: J1.21 v56,30.87 v56.01,30.86 | v49.85,41.91 49.72,41.78 47.94,41.78 47.75,41.59 47.75,38.35 49.47,36.64 v49.47,34.8 | R2.1 13.08,54.99 13.08,53.72 13.21,53.59 48.76,53.59 49.66,52.7 v49.66,44.7
  Bottom 0.254: v56.01,30.86 50.93,30.86 50.43,31.36 50.43,31.96 49.47,32.92 v49.47,34.8 | v49.85,41.91 49.85,44.51 v49.66,44.7
SCL0  (via drill 0.3)
  Top 0.254: J1.80 49,42.47 v48.9,42.36 | v48.13,43.43 47.95,43.25 47.28,43.25 46.48,42.45 46.48,30.29 48.77,28 48.77,16.8 51.49,14.07 J3.20 51.49,4.12 51.44,4.06 41.15,4.06 40.89,4.32 40.89,6.1 40.64,6.35 34.67,6.35 34.35,6.03 J4.20
  Bottom 0.254: v48.9,42.36 48.13,43.12 v48.13,43.43
SD_CLK  (via drill 0.3)
  Top 0.254: J1.57 56.48,38.07 56.64,38.23 v56.64,41.66 | v47.88,37.4 48.9,36.39 v48.9,34.29 | R6.1 16.87,6.49 20.57,10.2 20.57,16.8 v20.07,17.31
  Bottom 0.254: v56.64,41.66 52.87,41.66 50.93,39.72 50.93,37.97 50.16,37.21 48.07,37.21 v47.88,37.4 | SD_CARD.CLK v20.07,17.31 31.91,17.31 v48.9,34.29
SD_CMD  (via drill 0.3)
  Top 0.254: J1.62 50.6,38.87 v50.29,39.18 | R7.1 20.51,4.25 22.23,5.97 v22.23,19.37
  Bottom 0.254: v50.29,39.18 50.23,39.24 47.82,39.24 31.56,22.99 22.86,22.99 13.84,22.99 13.59,22.73 13.59,19.81 13.89,19.51 SD_CARD.CMD 22.09,19.51 v22.23,19.37
SD_DAT0  (via drill 0.3)
  Top 0.254: v53.09,39.8 53.22,39.67 53.3,39.67 53.7,39.27 J1.63 | v48.39,35.43 v48.39,31.75 | v19.81,15.11 20.19,14.73 20.19,10.41 14.83,5.05 R5.1
  Bottom 0.254: v53.09,39.8 52.63,39.8 52.07,39.24 52.07,37.37 50.77,36.07 48.83,36.07 48.39,35.62 v48.39,35.43 | SD_CARD.DAT0 v19.81,15.11 46.73,15.11 47.94,16.32 47.94,31.3 v48.39,31.75
SD_DAT1  (via drill 0.3)
  Top 0.254: J1.67 53.55,40.07 53.3,40.32 53.22,40.32 v53.09,40.45 | v47.88,35.81 47.88,31.11 48.26,30.73 v49.15,30.73
  Bottom 0.254: v53.09,40.45 52.95,40.32 52.61,40.32 51.69,39.4 51.69,37.53 50.61,36.45 48.45,36.45 47.88,35.88 v47.88,35.81 | SD_CARD.DAT1 47.03,14.01 49.15,16.13 v49.15,30.73
SD_DAT2  (via drill 0.3)
  Top 0.254: v53.09,41.11 53.22,40.97 53.3,40.97 53.8,40.47 J1.69
  Bottom 0.254: v53.09,41.11 52.95,40.97 52.72,40.97 51.31,39.56 51.31,37.78 50.35,36.83 48.13,36.83 33.06,21.76 SD_CARD.DAT2
SD_DAT3  (via drill 0.3)
  Top 0.254: J1.61 53.45,38.87 53.3,39.01 53.22,39.01 v53.09,39.15
  Bottom 0.254: v53.09,39.15 52.95,39.01 52.87,39.01 52.45,38.59 52.45,37.21 50.86,35.62 49.47,35.62 34.45,20.61 SD_CARD.CD/DAT3
SDA0  (via drill 0.3)
  Top 0.254: J1.82 47.5,42.87 46.93,42.29 46.93,30.39 49.15,28.16 49.15,16.96 52,14.11 v52,6.22 v51.99,6.22 J3.21 | J4.21 34.85,5.77 34.92,5.84 v35.94,5.84
  Bottom 0.254: v35.94,5.84 51.62,5.84 v52,6.22
USB2_N
  Top 0.254: J6.2 17.32,18.65 19.18,20.51 19.18,26.8 19.65,27.27 J2.3
USB2_P
  Top 0.254: J2.5 21.61,27.67 22.1,27.18 22.1,20.19 18.54,16.64 11.76,16.64 J6.3

## Text on the board
tPlace: 3.3V | 5V | GPIO2 | 5V | GPIO3 | GND | GPIO4 | GPIO14 | GND | GPIO15 | GPIO17 | GPIO18 | GPIO27 | GND | GPIO22 | GPIO23 | 3.3V | GPIO24 | GPIO10 | GND | GPIO9 | GPIO25 | GPIO11 | GPIO8 | GND | GPIO7 | GPIO0 | GPIO1 | GPIO5 | GND | JLCJLCJLCJLC | GPIO6 | GPIO12 | GPIO13 | GND | GPIO19 | GPIO16 | Hold Boot button / during start to / force USB boot / mode (CM4 / versions with / eMMC only) | GPIO26 | GPIO20 | Camera | Display | GND | GPIO21 | B | Boot
bPlace: Minimal RPi CM4 Carrier board | design based on Prof. Fartsparkle´s | Minimal Raspberry Pi CM 4 Carrier | This board was designed by | This board was designed by | czech maker | www.czechmaker.com
_tNames: 3V3